# EAGLE board 808_handclap (EAGLE 7.6.0)

Size 160 x 100 mm. Coordinates in mm from the lower left corner, seen from the top.
Outline: 0,0 160,0 160,100 0,100 0,0
Copper layers (1*16): Top 0.035mm / dielectric 1.5mm / Bottom 0.035mm
Design rules "default": minimum track width 10mil, minimum drill 24mil, track to track 8mil, track to pad 8mil, pad to pad 8mil, via to via 8mil, smd to smd 8mil, copper to edge 40mil, drill to drill 8mil, minimum pad ring 10mil, minimum via ring 8mil, stop-mask expansion 4mil, vias tented up to drill 0mil, thermal gap 10mil
Net classes: 0 default: width 0.635 mm, drill 0.254 mm, clearance 0.254 mm; 1 GND: width 1.016 mm, drill 1.016 mm, clearance 0.508 mm; 2 Power: width 1.016 mm, drill 1.016 mm, clearance 0.508 mm; 3 special: width 0.635 mm, drill 0.254 mm, clearance 0.254 mm; 4 15v: width 1.524 mm, drill 1.016 mm, clearance 0.508 mm

## Footprints (pad centres in the part's own frame; a part is rotated, then mirrored left to right if it is on the bottom)
E2-5 = drill 0.813 pad 1.27: + -1.016,0 | drill 0.813 pad 1.27 octagon: - 1.016,0
C035-025X75 = drill 0.8 octagon: P$1 -1.75,0; P$2 1.75,0
C050-024X044 = drill 0.813 octagon: 1 -2.54,0; 2 2.54,0
E3,5-8 = drill 0.813 pad 1.6: + -1.778,0 | drill 0.813 pad 1.6 octagon: - 1.778,0
C035-030X60 = drill 0.8 octagon: P$1 -2,0; P$2 2,0
C075-032X103 = drill 0.914 octagon: 1 -3.81,0; 2 3.81,0
C050-025X075 = drill 0.813 octagon: 1 -2.54,0; 2 2.54,0
DO35-10 = drill 0.813 long: A 5.08,0; C -5.08,0
DO35-7 = drill 0.813 long: A 3.81,0; C -3.81,0
DIL08 = drill 0.813 pad 1.27: 1 -3.81,-3.81; 2 -1.27,-3.81; 3 1.27,-3.81; 4 3.81,-3.81; 5 3.81,3.81; 6 1.27,3.81; 7 -1.27,3.81; 8 -3.81,3.81
DIL14 = drill 0.813 long: 1 -7.62,-3.81; 2 -5.08,-3.81; 3 -2.54,-3.81; 4 0,-3.81; 5 2.54,-3.81; 6 5.08,-3.81; 7 7.62,-3.81; 8 7.62,3.81; 9 5.08,3.81; 10 2.54,3.81; 11 0,3.81; 12 -2.54,3.81; 13 -5.08,3.81; 14 -7.62,3.81
ERTHENVAR-JACK-90DEG = drill 1.3 pad 2.54 long: P$1 5,-2.5; P$2 -0.2,-13.5; P$3 5,-15.7 | hole 1.3: 5.842,-2.489; 4.14,-2.489; -0.203,-12.649; -0.203,-14.351; 5.842,-15.697; 4.166,-15.697
TO92 = drill 0.813 octagon: 1 1.27,0; 2 0,1.905; 3 -1.27,0
0207/7 = drill 0.813 octagon: 1 -3.81,0; 2 3.81,0
0204/10 = drill 0.8: 1 -5.08,0; 2 5.08,0
0309/10 = drill 0.813 octagon: 1 -5.08,0; 2 5.08,0
0207/5V = drill 0.813 octagon: 1 -2.54,0; 2 2.54,0
0207/2V = drill 0.813 octagon: 1 -1.27,0; 2 1.27,0
0204/10-V = drill 0.8: 1 0,5.08; 2 0,-5.08
3RP/1610N = drill 1.2 pad 2.184: 1 -5,0; 2 0,0; 3 5,0
S64YW = drill 0.813 octagon: A 2.54,1.27; E -2.54,1.27; S 0,-1.27; S@1 0,1.27
SIL09 = drill 0.8 long: 1 10.16,0; 2 7.62,0; 3 5.08,0; 4 2.54,0; 5 0,0; 6 -2.54,0; 7 -5.08,0; 8 -7.62,0; 9 -10.16,0
POWER_16 = drill 1.016 pad 1.88 octagon: 1 -6.35,-1.27; 2 -6.35,1.27; 3 -3.81,-1.27; 4 -3.81,1.27; 5 -1.27,-1.27; 6 -1.27,1.27; 7 1.27,-1.27; 8 1.27,1.27; 9 3.81,-1.27; 10 3.81,1.27; 11 6.35,-1.27; 12 6.35,1.27; 13 8.89,-1.27; 14 8.89,1.27; 15 11.43,-1.27; 16 11.43,1.27
22-23-2021 = drill 1 long: 1 -1.27,0; 2 1.27,0

## Placement (x,y rotation side)
C1  .47/50  [E2-5]  -21.59,67.31 0 top  (outside the outline)
C2  1/50  [E2-5]  -31.75,67.31 0 top  (outside the outline)
C3  4.7n  [C035-025X75]  -16.51,53.34 0 top  (outside the outline)
C4  4.7n  [C035-025X75]  -22.86,53.34 0 top  (outside the outline)
C5  18n  [C035-025X75]  -29.21,53.34 0 top  (outside the outline)
C6  1n  [C035-025X75]  -35.56,53.34 0 top  (outside the outline)
C7  1n  [C035-025X75]  -41.91,53.34 0 top  (outside the outline)
C8  4.7n  [C035-025X75]  -48.26,53.34 0 top  (outside the outline)
C9  22n  [C050-024X044]  -54.61,53.34 0 top  (outside the outline)
C10  47n  [C050-024X044]  -62.23,53.34 0 top  (outside the outline)
C11  27n  [C050-024X044]  -69.85,53.34 0 top  (outside the outline)
C12  220p  [C050-024X044]  -77.47,53.34 0 top  (outside the outline)
C13  33/6.3  [E3,5-8]  -46.99,44.45 0 top  (outside the outline)
C14  18n  [C035-030X60]  -54.61,43.18 0 top  (outside the outline)
C15  1.8n  [C075-032X103]  -64.77,43.18 0 top  (outside the outline)
C16  33n  [C075-032X103]  -76.2,43.18 0 top  (outside the outline)
C17  220p  [C050-025X075]  -86.36,43.18 0 top  (outside the outline)
D1  1N4148DO35-10  [DO35-10]  -25.4,60.96 0 top  (outside the outline)
D2  1N4148DO35-10  [DO35-10]  -44.45,60.96 0 top  (outside the outline)
D3  1N4148DO35-7  [DO35-7]  -62.23,60.96 0 top  (outside the outline)
D4  1N4148DO35-7  [DO35-7]  -78.74,60.96 0 top  (outside the outline)
IC1  TL071P  [DIL08]  -19.05,44.45 0 top  (outside the outline)
IC2  TL071P  [DIL08]  -31.75,44.45 0 top  (outside the outline)
IC3  LM339N  [DIL14]  -31.75,31.75 0 top  (outside the outline)
OUTPUT  AUDIO-JACK  [ERTHENVAR-JACK-90DEG]  -41.91,17.78 0 top  (outside the outline)
Q1  2N3904  [TO92]  -22.86,78.74 0 top  (outside the outline)
Q2  2N3904  [TO92]  -35.56,78.74 0 top  (outside the outline)
Q3  2N3904  [TO92]  -48.26,78.74 0 top  (outside the outline)
Q4  2N3906  [TO92]  -48.26,72.39 0 top  (outside the outline)
Q5  2N3906  [TO92]  -60.96,72.39 0 top  (outside the outline)
Q6  2N3906  [TO92]  -73.66,72.39 0 top  (outside the outline)
Q7  2N3904  [TO92]  -86.36,72.39 0 top  (outside the outline)
R1  470K  [0207/7]  -17.78,88.9 0 top  (outside the outline)
R2  1M  [0204/10]  -19.05,99.06 0 top  (outside the outline)
R3  39K  [0207/7]  -27.94,88.9 0 top  (outside the outline)
R4  2K7  [0204/10]  -31.75,99.06 0 top  (outside the outline)
R5  47K  [0207/7]  -38.1,88.9 0 top  (outside the outline)
R6  1K  [0204/10]  -43.18,93.98 0 top  (outside the outline)
R7  68K  [0204/10]  -44.45,99.06 0 top  (outside the outline)
R8  10K  [0207/7]  -48.26,88.9 0 top  (outside the outline)
R9  27K  [0204/10]  -55.88,93.98 0 top  (outside the outline)
R10  68K  [0204/10]  -57.15,99.06 0 top  (outside the outline)
R11  100K  [0207/7]  -58.42,88.9 0 top  (outside the outline)
R12  10K  [0204/10]  -68.58,93.98 0 top  (outside the outline)
R13  82K  [0207/7]  -68.58,88.9 0 top  (outside the outline)
R14  330K  [0204/10]  -69.85,99.06 0 top  (outside the outline)
R15  15K  [0204/10]  -81.28,93.98 0 top  (outside the outline)
R16  470K  [0204/10]  -82.55,99.06 0 top  (outside the outline)
R17  680  [0207/7]  -17.78,83.82 0 top  (outside the outline)
R18  1M  [0207/7]  -27.94,83.82 0 top  (outside the outline)
R19  4K7  [0207/7]  -38.1,83.82 0 top  (outside the outline)
R20  10K  [0207/7]  -48.26,83.82 0 top  (outside the outline)
R21  22K  [0207/7]  -55.88,77.47 0 top  (outside the outline)
R22  27K  [0207/7]  -58.42,83.82 0 top  (outside the outline)
R23  10K  [0207/7]  -66.04,77.47 0 top  (outside the outline)
R24  10K  [0207/7]  -68.58,83.82 0 top  (outside the outline)
R25  15K  [0207/7]  -78.74,83.82 0 top  (outside the outline)
R26  150K  [0207/7]  -86.36,77.47 0 top  (outside the outline)
R27  330  [0207/7]  -88.9,83.82 0 top  (outside the outline)
R28  4K7  [0309/10]  -19.05,72.39 0 top  (outside the outline)
R29  47K  [0309/10]  -31.75,72.39 0 top  (outside the outline)
R30  4K7  [0207/5V]  -38.1,67.31 0 top  (outside the outline)
R31  10K  [0207/5V]  -45.72,67.31 0 top  (outside the outline)
R32  4K7  [0207/5V]  -53.34,67.31 0 top  (outside the outline)
R33  5K6  [0207/5V]  -60.96,67.31 0 top  (outside the outline)
R34  82K  [0207/5V]  -68.58,67.31 0 top  (outside the outline)
R35  1K  [0207/5V]  -76.2,67.31 0 top  (outside the outline)
R36  1K  [0207/5V]  -83.82,67.31 0 top  (outside the outline)
R37  22K  [0207/2V]  -90.17,59.69 0 top  (outside the outline)
R38  330R  [0204/10-V]  -13.97,33.02 0 top  (outside the outline)
R39  15K  [0204/10-V]  -19.05,33.02 0 top  (outside the outline)
R40  1M  [0204/10-V]  -80.01,6.35 0 top  (outside the outline)
R41  1M  [0204/10-V]  -85.09,6.35 0 top  (outside the outline)
R42  2K2  [0204/10-V]  -90.17,6.35 0 top  (outside the outline)
R200'  10K  [0207/7]  -76.2,77.47 0 top  (outside the outline)
REVERB  100k  [3RP/1610N]  -52.07,13.97 0 top  (outside the outline)
TM1  10K(B)  [S64YW]  -69.85,31.75 0 top  (outside the outline)
U1  BA6110SIL  [SIL09]  -25.4,95.25 0 top  (outside the outline)
U2  POWER  [POWER_16]  -55.88,33.02 0 top  (outside the outline)
VR17  100K(A)  [3RP/1610N]  -69.85,13.97 0 top  (outside the outline)
WHITE_NOISE  AUDIO-JACK  [ERTHENVAR-JACK-90DEG]  -29.21,17.78 0 top  (outside the outline)
WHITE_NORM  22-23-2021  [22-23-2021]  -82.55,31.75 0 top  (outside the outline)

## Library data of the parts
C1-C17 D1-D4 R1 R3 R5 R8 R11 R13 R17-R37 R200' U1 = TR808clone
IC1 IC2 = 808_lt
IC3 = linear
OUTPUT WHITE_NOISE = erthenvar
Q1-Q3 Q7 = transistor-npn
Q4-Q6 = transistor-pnp
R2 R4 R6 R7 R9 R10 R12 R14-R16 R38-R42 = r
REVERB TM1 VR17 = pot
U2 = eurorack
WHITE_NORM = con-molex; MF: MOLEX; MPN: 22-23-2021; OC_FARNELL: 1462926; OC_NEWARK: 25C3832

## Nets
+12V [Power]: IC1.7 IC2.7 Q7.1 R24.1 R25.1 U1.9 U2.9 U2.10
-12V: D4.A IC1.4 IC2.4 IC3.12 Q3.3 Q6.1 R32.2 R37.2 R200'.2 TM1.A U1.5 U2.1 U2.2
CP: R21.1 U2.15 U2.16
GND [GND]: C1.+ C2.- C5.P$1 C10.2 C11.1 C14.P$2 IC1.3 IC3.3 OUTPUT.P$1 Q1.3 R5.1 R12.1 R13.1 R17.1 R18.1 R19.1 R20.1 R23.1 R33.2 R34.2 R35.1 R36.2 R38.2 R39.1 R42.2 TM1.E U2.3 U2.4 U2.5 U2.6 U2.7 U2.8 WHITE_NOISE.P$1 WHITE_NORM.2
N$1: OUTPUT.P$3 R6.1
N$2: WHITE_NOISE.P$2 WHITE_NORM.1
N$3: Q1.1 R31.1
N$4: Q1.2 R21.2 R23.2
N$10: C4.P$2 C9.1 IC1.6 R15.1 R26.2
N$37: Q5.2 R30.1 R31.2
N$40: C16.2 Q2.2 R2.1
N$41: C5.P$2 D1.C R40.2
N$42: Q2.3 R38.1 R200'.1
N$43: Q5.1 Q7.2 R22.1
N$44: D1.A D3.A Q7.3
N$45: C10.1 R2.2 R40.1
N$46: C8.P$1 C14.P$1 Q2.1 R24.2
N$47: C2.+ D3.C R14.2
N$48: Q6.2 R14.1 R29.2 R42.1
N$49: R29.1 TM1.S
N$50: C16.1 R15.2 R17.2
N$51: D2.A IC3.2 R34.1
N$52: C3.P$2 C4.P$1 C15.2 R9.2 R12.2
N$54: C3.P$1 IC1.2 R26.1
N$55: C9.2 R3.2
N$56: R3.1 R36.1 U1.2
N$57: C8.P$2 REVERB.3
N$59: R35.2 U1.1
N$60: R8.1 U1.4
N$61: R13.2 U1.6 U1.7
N$62: C7.P$2 R11.1
N$63 [special]: C7.P$1 U1.8
N$64: IC3.5 IC3.6 R19.2 R28.1
N$65: C1.- D2.C R27.1 R41.1
N$66: Q4.2 R1.1 R39.2
N$67: Q4.3 Q6.3 R25.2
N$68: C6.P$1 IC3.1 IC3.4 R4.2
N$69: Q4.1 R8.2
N$70: Q3.1 R1.2 R27.2
N$71: IC3.9 R28.2 R32.1
N$72: C17.2 IC3.11 R41.2
N$73: IC3.10 R4.1 R33.1
N$74: IC3.8 R22.2 R37.1
N$75: Q3.2 R7.1 R10.2
N$76: C6.P$2 D4.C R7.2
N$77: C11.2 IC3.7 IC3.14 R18.2
N$78: C17.1 IC3.13 R10.1 R20.2
N$91: IC2.3 R5.2
N$92 [special]: C12.2 IC2.2 R11.2 R16.2 REVERB.2 VR17.1
N$95: C13.- VR17.2
N$97: C12.1 C13.+ IC2.6 R6.2 R16.1
TRIG: Q5.3 R30.2 U2.13 U2.14
WN: C15.1 R9.1 WHITE_NOISE.P$3

## Tracks (layer width: path | path; a pad name or v marks a point on that pad's centre or on a via)
+12V  (7 unrouted)
-12V  (12 unrouted)
CP  (2 unrouted)
GND  (33 unrouted)
N$1  (1 unrouted)
N$2  (1 unrouted)
N$3  (1 unrouted)
N$4  (2 unrouted)
N$10  (4 unrouted)
N$37  (2 unrouted)
N$40  (2 unrouted)
N$41  (2 unrouted)
N$42  (2 unrouted)
N$43  (2 unrouted)
N$44  (2 unrouted)
N$45  (2 unrouted)
N$46  (3 unrouted)
N$47  (2 unrouted)
N$48  (3 unrouted)
N$49  (1 unrouted)
N$50  (2 unrouted)
N$51  (2 unrouted)
N$52  (4 unrouted)
N$54  (2 unrouted)
N$55  (1 unrouted)
N$56  (2 unrouted)
N$57  (1 unrouted)
N$59  (1 unrouted)
N$60  (1 unrouted)
N$61  (2 unrouted)
N$62  (1 unrouted)
N$63  (1 unrouted)
N$64  (3 unrouted)
N$65  (3 unrouted)
N$66  (2 unrouted)
N$67  (2 unrouted)
N$68  (3 unrouted)
N$69  (1 unrouted)
N$70  (2 unrouted)
N$71  (2 unrouted)
N$72  (2 unrouted)
N$73  (2 unrouted)
N$74  (2 unrouted)
N$75  (2 unrouted)
N$76  (2 unrouted)
N$77  (3 unrouted)
N$78  (3 unrouted)
N$91  (1 unrouted)
N$92  (5 unrouted)
N$95  (1 unrouted)
N$97  (4 unrouted)
TRIG  (3 unrouted)
WN  (2 unrouted)